# Altium PCB ToolDoorController.PcbDoc
Units mm, origin at the board's own origin, x right, y up, seen from the top; angles counter-clockwise.
Board outline 50 x 50 mm, 2 copper layers (Top Layer, Bottom Layer); 44 components, 41 nets, 165 pads, 32 vias.
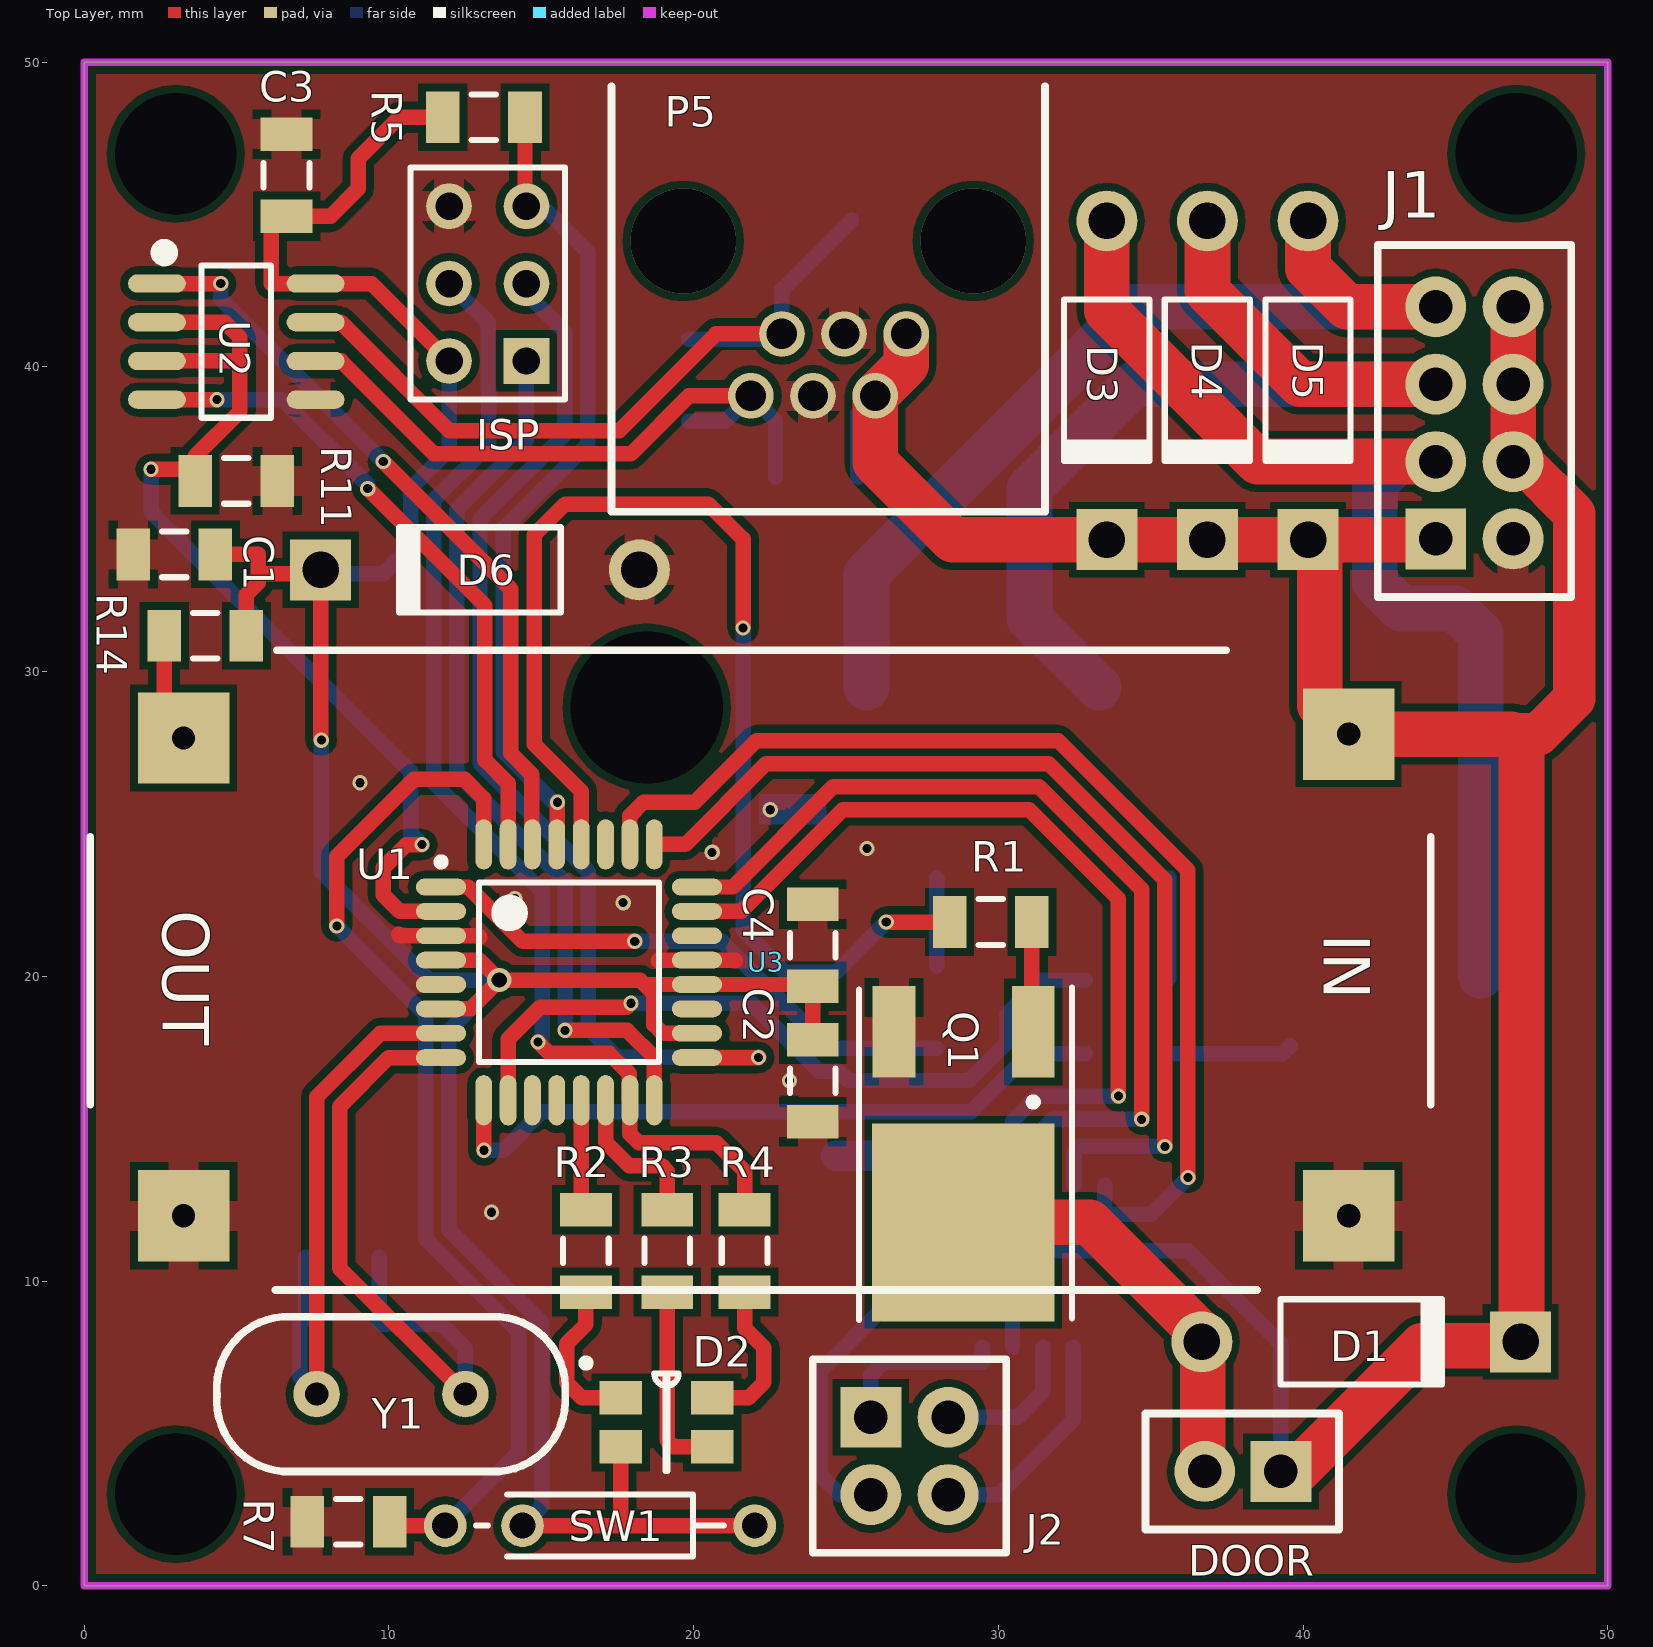
[diagram p0: Top Layer view]
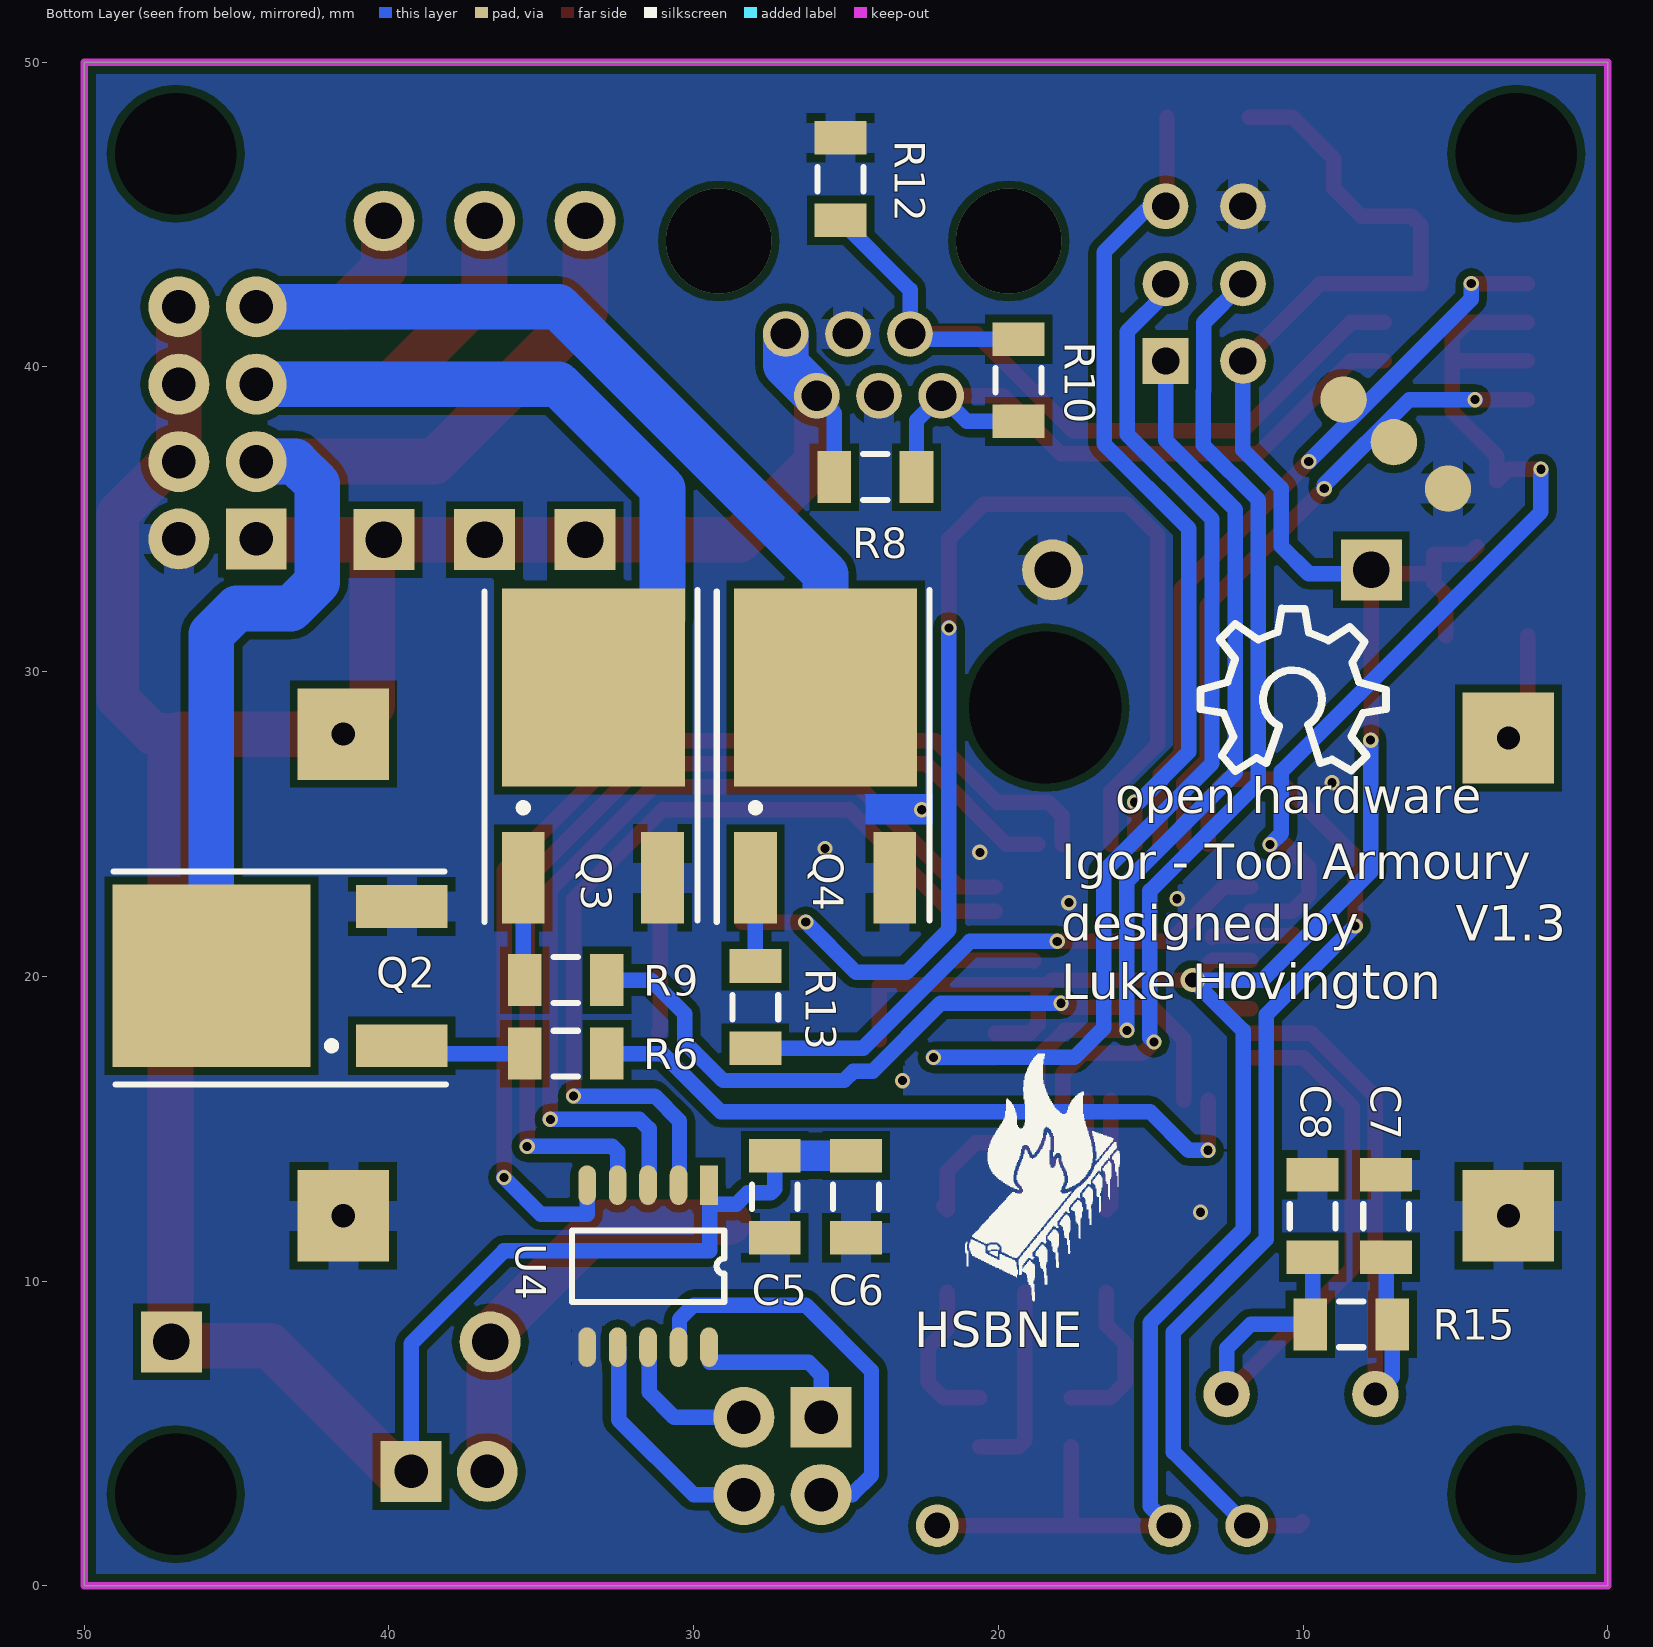
[diagram p1: Bottom Layer view, seen from below]

## Layer stack, top to bottom
Top Layer: signal copper 0.0356
Dielectric: dielectric 0.32, FR-4, Dk 4.8
Bottom Layer: signal copper 0.0356

## Board outline
0,50 50,50 50,0 0,0

## Design rules (kind name [scope] priority, off if disabled: settings)
Clearance [All] p1: gap=0.25
HoleSize [All] p1: absolutevalues=TRUE maxlimit=3.5 minlimit=0.3 maxpercent=80.000 minpercent=20.000
MinimumSolderMaskSliver [(InComponent('U1') OR InComponent('U4') OR InComponent('Y1'))] p1: minsoldermaskwidth=0.045
MinimumSolderMaskSliver MinimumSolderMaskSliver_1 [All] p2: minsoldermaskwidth=0.25
PolygonConnect [All] p1: connectstyle=Relief reliefconductorwidth=1 reliefentries=4 polygonreliefangle="90 Angle" airgapwidth=0.254
RoutingVias [All] p1: holewidth=0.3 width=0.5 viastyle="Through Hole" minholewidth=0.2 minwidth=0.5 maxholewidth=0.711 maxwidth=1.27
SilkToSolderMaskClearance [IsPad] p1 off: minsilkscreentomaskgap=0.254 clearancetoexposedcopper=TRUE
SolderMaskExpansion [All] p1: expansion=0.102
Width [All] p1: maxlimit=1.5 minlimit=0.254 preferedwidth=0.508 minimp=50.000000 maximp=50.000000 favimp=50.000000
25 further rules are at their usual default settings.

## Components (designator, comment, footprint, x,y, rotation, side; value= is the part's Value field where it differs from the comment)
C1 "100nF" C1206 2.954,33.848 r0 top
C2 "100nF" C1206 23.909,16.576 r90 top
C3 "100nF" C1206 6.637,46.294 r270 top
C4 "1uF" C1206 23.909,21.021 r270 top
C5 "1uF" C1206 27.338,12.766 r90 bottom
C6 "100nF" C1206 24.671,12.766 r90 bottom
C7 "100pF" C1206 7.272,12.131 r270 bottom
C8 "100pF" C1206 9.685,12.131 r270 bottom
D1 "Diode 1N4004" DO-41 41.91,8.001 r0 top
D2 "LED-RGB_K" RGB-CLVBAFKA 17.607,6.162 r0 top
D3 "Diode 1N4004" DO-41 33.561,39.563 r270 top
D4 "Diode 1N4004" DO-41 36.863,39.563 r270 top
D5 "Diode 1N4004" DO-41 40.165,39.563 r270 top
D6 "Zener 5v6" DO-41 12.987,33.34 r180 top
DOOR "Solenoid" JST-XH 39.276,3.749 r180 top
ISP "ISP" HDR2X3 14.511,40.198 r90 top
J1 "AuxOutput" AUX-Out 44.356,34.356 r90 top
J2 "MotorOutput" Motor_Out 25.814,5.527 r0 top
P5 "RJE01-660-01" RJ11 24.417,41.595 r180 top
Q1 "FDD7N25LZTM" DPAC-3 28.862,15.052 r180 top
Q2 "FDD7N25LZTM" DPAC-3 42.705,20.005 r90 bottom
Q3 "FDD7N25LZTM" DPAC-3 33.307,26.355 r180 bottom
Q4 "FDD7N25LZTM" DPAC-3 25.687,26.355 r180 bottom
R1 "100R" C1206 29.751,21.783 r0 top
R2 "100R" C1206 16.464,10.988 r270 top
R3 "100R" C1206 19.131,10.988 r270 top
R4 "100R" C1206 21.671,10.988 r270 top
R5 "10K" C1206 13.114,48.199 r180 top
R6 "100R" C1206 34.196,17.465 r0 bottom
R7 "10K" C1206 8.669,2.098 r0 top
R8 "390R" C1206 24.036,36.388 r0 bottom
R9 "100R" C1206 34.196,19.878 r0 bottom
R10 "220R" C1206 19.337,39.563 r270 bottom
R11 "10K" C1206 4.986,36.261 r180 top
R12 "390R" C1206 25.179,46.167 r270 bottom
R13 "100R" C1206 27.973,18.989 r90 bottom
R14 "10R" C1206 3.97,31.181 r0 top
R15 "1K" C1206 8.415,8.575 r0 bottom
SW1 "Switch" ReedSwitch 16.924,1.971 r0 top
U1 "ATmega8-16AC" 32A_N 15.908,20.132 r0 top
U2 "MAX14770EESA+" 8S1_L 4.986,40.833 r0 top
U3 "5V Buck Converter" "BUCK_MODULE - UPSIDEDOWN" 22.258,20.64 r0 top
U4 "LV8548MC Motor Driver" 10S1_M 29.497,13.147 r270 bottom
Y1 "Crystal" CRYSTAL_AXIAL 10.066,6.289 r0 top

## Footprints (in the part's own frame and the unit in brackets; to place one, negate y for a bottom-side part, rotate by r counter-clockwise, add the part's x,y. Pads: shape width x height; smd on the part's side, far side on the other; paste and mask are expansions set on the pad)
8S1_L [mm] "SOIC, 8-Leads, Body 4.9x3.9mm, Pitch 1.27mm, IPC High Density"
  oval 1.9x0.6 smd: 1(-2.604,1.905) 2(-2.604,0.635) 3(-2.604,-0.635) 4(-2.604,-1.905) 5(2.604,-1.905) 6(2.604,-0.635) 7(2.604,0.635) 8(2.604,1.905)
  silkscreen extent -2.56,-2.5 1.14,3.12, body extent -2,-2.5 2,2.5, height 1.75
10S1_M [mm]
  rect 1.3x0.58 smd: 1(0,0)
  oval 1.3x0.58 smd: 2(0,-1) 3(0,-2) 4(0,-3) 5(0,-4) 6(5.32,-4) 7(5.32,-3) 8(5.32,-2) 9(5.32,-1) 10(5.32,0)
  silkscreen extent 1.48,-4.5 3.84,0.5, body extent 0,-4.57 5.33,0.76, height 1.75
32A_N [mm] "Thin QFP, 32-Leads, Body 7x7mm, Pitch 0.8mm, IPC Medium Density"
  oval 1.65x0.55 smd: 1(-4.2,2.8) 2(-4.2,2) 3(-4.2,1.2) 4(-4.2,0.4) 5(-4.2,-0.4) 6(-4.2,-1.2) 7(-4.2,-2) 8(-4.2,-2.8) 17(4.2,-2.8) 18(4.2,-2) 19(4.2,-1.2) 20(4.2,-0.4) 21(4.2,0.4) 22(4.2,1.2) 23(4.2,2) 24(4.2,2.8)
  oval 0.55x1.65 smd: 9(-2.8,-4.2) 10(-2,-4.2) 11(-1.2,-4.2) 12(-0.4,-4.2) 13(0.4,-4.2) 14(1.2,-4.2) 15(2,-4.2) 16(2.8,-4.2) 25(2.8,4.2) 26(2,4.2) 27(1.2,4.2) 28(0.4,4.2) 29(-0.4,4.2) 30(-1.2,4.2) 31(-2,4.2) 32(-2.8,4.2)
  silkscreen extent -4.32,-2.95 2.95,3.75, body extent -3.5,-3.5 3.5,3.5, height 1.2
AUX-Out [mm] "2.54mm"
  rect 2x2 hole 1.1: 1(0,0)
  round 2 hole 1.1: 2(0,-2.54) 3(2.54,0) 4(2.54,-2.54) 5(5.08,0) 6(5.08,-2.54) 7(7.62,0) 8(7.62,-2.54)
  silkscreen extent -1.91,-4.44 9.65,1.91
"BUCK_MODULE - UPSIDEDOWN" [mm]
  round 3 hole 5 unplated: 0(-3.8,8.184)
  rect 3x3 hole 0.762: 1(19.241,7.311) 2(-19,7.184) 3(-19,-8.5) 4(19.241,-8.5)
  silkscreen extent -22.06,-10.94 21.94,10.06, body extent -21.97,-10.98 21.91,10.16, height 12
C1206 [mm] "Chip Capacitor, Body 3.2x1.6mm, IPC High Density"
  rect 1.1x1.7 smd: 1(-1.35,0) 2(1.35,0)
  silkscreen extent -0.4,-0.75 0.4,0.75, body extent -1.7,-0.9 1.7,0.9, height 1.3
CRYSTAL_AXIAL [mil] "Axial"
  round 60 hole 30: 1(-96.06,0) 2(96.06,0)
  silkscreen extent -225,-100 225,100
DO-41 [mm] "Diode, Axial; Body 5.2 x 2.7 mm (LxDia. max), Lead Dia. 0.86 mm (max)"
  round 2 hole 1.2: 1(-5.23,0)
  rect 2x2 hole 1.2: 2(5.23,0)
  silkscreen extent -2.65,-1.41 2.75,1.4
DPAC-3 [mm] "D-PAC"
  rect 6x6.5 smd: 1(0.015,3.125)
  rect 1.4x3 smd: 2(-2.285,-3.125) 3(2.285,-3.125)
  silkscreen extent -3.55,-4.58 3.43,6.33
HDR2X3 [mm] "Connector; Header; 3x2 Position"
  rect 1.5x1.5 hole 0.9: 1(0,0)
  round 1.5 hole 0.9: 2(0,2.54) 3(2.54,0) 4(2.54,2.54) 5(5.08,0) 6(5.08,2.54)
  silkscreen extent -1.27,-1.27 6.35,3.81
JST-XH [mm] "JST-XH"
  rect 2x2 hole 1.1: 1(0,0)
  round 2 hole 1.1: 2(2.5,0)
  silkscreen extent -1.91,-1.91 4.44,1.91
Motor_Out [mm] "2.54mm"
  rect 2x2 hole 1.1: 1(0,0)
  round 2 hole 1.1: 2(0,-2.54) 3(2.54,0) 4(2.54,-2.54)
  silkscreen extent -1.91,-4.44 4.44,1.91
ReedSwitch [mm] "Axial Device, Thru-Hole; 2 Leads; 0.4 in Pin Spacing"
  round 1.4 hole 0.85: 1(-5.08,0) 2(-2.54,0) 2(5.08,0)
  silkscreen extent -4.06,-1.02 4.06,1.02
RGB-CLVBAFKA [mm]
  rect 1.4x1.1 smd: 1(0,0) 2(0,-1.6) 3(3,-1.6) 4(3,0)
  silkscreen extent -1.27,-2.4 1.9,1.27
RJ11 [mm]
  round 1.5 hole 1: 1(2.54,2.54) 2(1.52,0.51) 3(0.5,2.54) 4(-0.52,0.51) 5(-1.54,2.54) 6(-2.56,0.51)
  silkscreen extent -7.11,-7.62 7.11,6.35

## Part data
C1 C2 C3 C6 C7 C8: library part "Cap 100nF", "Capacitor (Semiconductor SIM Model)"
C4 C5: library part "Cap 1uF", "Capacitor (Semiconductor SIM Model)"
D1 D3 D4 D5: "1 Amp General Purpose Rectifier"
D2: "RED, GREEN, BLUE LED"
D6: library part "Zener 1N5232BTR", "5v6 Zener"
DOOR: library part "Header 2 JST-XH", "Header, 2-Pin"
ISP: library part "Header 3X2", "Header, 3-Pin, Dual row"
J1: library part AuxOut, "AuxOut"
J2: library part MotorOut, "MotorOut"
P5: library part RJ11, "RJ11"
Q1 Q2 Q3 Q4: library part MOSFET-N, "N-Channel MOSFET"
R1 R2 R3 R4 R6 R9 R13: library part Resistor-100R, "Resistor"
R5 R7 R11 R15: library part Resistor-10K, "Resistor"
R8 R12: library part Resistor-390R, "Resistor"
R10: library part Resistor-220R, "Resistor"
R14: library part Resistor-10R, "Resistor"
SW1: "ReedSwitch"
U1: "8-Bit AVR Microcontroller with 8K Bytes of In-System Programmable Flash Memory"
U2: "TXRX PROFIBUS RS-485 8-SOIC"
U3: library part "5V Buck", "5V Buck Converter Module"
U4: library part LV8548MC, "Forward/Reverse Motor Driver"
Y1: "Surface Mount Quartz Crystal"

## Free pads (board coordinates)
  round 1.524 smd far side paste-1.524: 0(5.24,36.007) 0(7.018,37.531) 0(8.669,38.928)
  round 1.524 hole 4 unplated: ""(3,3) ""(3,47) ""(47,3) ""(47,47)

## Via types
v1: diameter 0.5, hole 0.3, Top Layer to Bottom Layer, tented both sides, 29 vias
v2: diameter 3.45, hole 3.45, Top Layer to Bottom Layer, 2 vias
v3: diameter 0.8, hole 0.5, Top Layer to Bottom Layer, tented both sides, 1 vias

## Nets (pads, with @x,y where several pads share a name; then routed paths per layer and width w, separated by ;. In a path a pad name is that pad's centre, name@x,y a point inside that pad or via, vN(x,y) a via of type N, cw(c..) or ccw(c..) an arc to the next point about the centre after c; other vN are vias at no path point)
5V: C1.2 C2.2 C3.2 C4.2 D2.2 D6.2 ISP.2 R5.2 R14.2 SW1.2 U1.4 U1.6 U1.18 U1.20 U2.8 | length 99.8
  Top Layer w0.508: C1.2@4.304,34.102 4.558,33.848 5.701,33.848 5.701,32.912 5.32,32.531 R14.2 ; 5.748,33.213 7.757,33.213 7.757,27.775 v1(7.78,27.752) ; U1.6 12.676,18.932 v3(13.622,19.878) ; U1.4 12.968,20.532 v3(13.622,19.878) ; R5.2 10.35,48.199 8.991,46.84 8.991,45.854 8.081,44.944 C3.2 6.43,44.944 6.129,44.643 6.129,42.738 7.336,42.738 9.431,42.738 ISP.2 ; SW1.2@14.384,1.971 17.686,1.971 ; D2.2 17.607,2.05 17.686,1.971 ; U1.18 18.98,18.132 18.694,18.418 18.694,19.428 18.448,19.674 ; SW1.2@22.004,1.971 17.686,1.971 ; C2.2 C4.2 23.848,19.732 U1.20 18.506,19.732 18.448,19.674 ; v3(13.622,19.878) 13.63,19.87 18.252,19.87 18.448,19.674
  Bottom Layer w0.508: D6.2@7.757,33.213 9.812,33.213 10.709,34.11 10.709,36.015 11.971,37.277 ISP.2 ; v1(7.78,27.752) 7.78,23.434 11.336,19.878 v3(13.622,19.878) 11.967,18.223 11.967,11.683 15.019,8.631 15.019,2.606 SW1.2@14.384,1.971
12V: C5.2 C6.2 D1.2 D3.2 D4.2 D5.2 DOOR.1 J1.1 J1.4 J1.6 J1.8 P5.5 P5.6 R8.2 U3.1 U4.1 | length 111.6
  Top Layer w1.4: 46.824,27.951 47.73,27.951 48.9,29.121 48.9,35.186 J1.4@47.19,36.896
  Top Layer w1.5: P5.6 26.977,40.075 P5.5 25.957,36.88 28.504,34.333 D3.2 D4.2 D5.2 D5.2@40.546,34.333 ; DOOR.1@39.53,3.495 43.909,7.874 47.013,7.874 47.173,8.034 47.173,27.602 46.824,27.951 U3.1 40.546,28.903 D5.2@40.546,34.333 ; J1.1@44.333,34.333 D5.2@40.546,34.333 ; J1.8 J1.6 J1.4 J1.4@47.19,36.896
  Bottom Layer w0.508: R8.2 25.386,38.484 P5.5 ; C5.2 27.338,13.02 27.465,12.893 28.227,12.893 28.608,12.512 U4.1@29.465,12.512 ; U4.1@29.465,13.147 U4.1@29.465,12.512 ; DOOR.1@39.276,3.241 39.276,7.94 36.228,10.988 29.465,10.988 U4.1@29.465,12.512
  Bottom Layer w1: C6.2 C5.2
  Bottom Layer w1.5: P5.5 26.977,40.075 P5.6
AUX1: R6.1 U1.9 | length 22.7
  Top Layer w0.508: v1@13.108,14.296 U1.9
  Bottom Layer w0.508: v1(13.114,14.29) 13.749,14.29 15.019,15.56 29.116,15.56 31.021,17.465 R6.1
AUX2: R9.1 U1.10 | length 24.4
  Top Layer w0.508: U1.10 13.908,17.934 14.959,18.985 17.803,18.985 v1@17.93,19.112
  Bottom Layer w0.508: v1(17.94,19.116) 21.892,19.116 24.127,16.881 24.761,16.881 25.061,16.581 29.033,16.581 30.298,17.846 30.298,18.774 31.402,19.878 R9.1
AUX3: R13.1 U1.1 | length 18.5
  Top Layer w0.508: U1.1 12.6,22.932 14.384,21.148 v1(18.067,21.148)
  Bottom Layer w0.508: v1(18.067,21.148) 20.932,21.148 24.441,17.639 R13.1
AUX_OUT1: D3.1 J1.3 Q2.1 | length 36.7
  Top Layer w1.5: D3.1 33.561,41.849 38.514,36.896 J1.3
  Bottom Layer w1.5: J1.3 43.086,36.896 42.352,36.162 42.352,32.94 43.222,32.07 44.991,32.07 45.83,31.231 Q2.1
AUX_OUT2: D4.1 J1.5 Q3.1 | length 33.3
  Top Layer w1.5: D4.1 36.863,42.484 39.911,39.436 J1.5
  Bottom Layer w1.5: Q3.1 31.021,31.751 31.021,36.007 34.45,39.436 J1.5
AUX_OUT3: D5.1 J1.7 Q4.1 | length 32.3
  Top Layer w1.5: D5.1 40.165,43.246 41.435,41.976 J1.7
  Bottom Layer w1.5: Q4.1 25.672,33.198 34.45,41.976 J1.7
COM_TR: R11.2 U1.2 U2.2 U2.3 | length 32.5
  Top Layer w0.508: v1(2.192,36.642) 3.255,36.642 R11.2 3.636,37.07 5.109,38.543 5.109,40.964 4.605,41.468 U2.2@2.636,41.468 ; U2.3@2.636,40.198 4.986,40.198 ; v1(11.082,24.323) 10.572,24.323 9.812,23.563 9.812,22.672 10.352,22.132 U1.2
  Bottom Layer w0.508: v1(2.192,36.642) 2.192,35.245 10.709,26.728 10.709,24.696 v1(11.082,24.323)
DOOR: R1.1 U1.28 | length 39.4
  Top Layer w0.508: U1.28 16.308,26.082 14.765,27.625 14.765,34.483 15.781,35.499 20.48,35.499 21.623,34.356 v1(21.623,31.435) ; v1(26.322,21.783) R1.1
  Bottom Layer w0.508: v1(21.623,31.435) 21.623,21.529 23.02,20.132 24.671,20.132 v1(26.322,21.783)
GND: C1.1 C2.1 C3.1 C4.1 C5.1 C6.1 C7.1 C8.1 D6.1 ISP.6 J1.2 P5.3 P5.4 pad.0@5.24,36.007 Q1.3 Q2.3 Q3.3 Q4.3 R7.1 R11.1 R12.1 U1.3 U1.5 U1.21 U2.5 U3.3 U3.4 U4.6 | length 5.3
  Top Layer w0.508: 10.32,21.374 10.362,21.332 U1.3 12.945,21.332 12.987,21.29 ; 18.829,20.513 18.848,20.532 U1.21 21.35,20.532 21.369,20.513
  other v1: 13.368,12.258 23.145,16.576 17.686,22.418 14.13,22.545 20.607,24.069 25.687,24.196 22.512,25.466 9.05,26.355
LED_B: R3.1 U1.14 | length 5.1
  Top Layer w0.508: U1.14 17.108,14.558 17.88,13.786 18.952,13.786 19.131,13.607 R3.1
LED_R: R2.1 U1.13 | length 3.7
  Top Layer w0.508: U1.13 16.308,12.494 R2.1
M1_1: U1.23 U4.2 | length 28.8
  Top Layer w0.508: U1.23 21.557,22.132 24.891,25.466 31.021,25.466 33.942,22.545 v1(33.942,16.068)
  Bottom Layer w0.508: U4.2@30.465,13.147 30.465,15.258 31.275,16.068 v1(33.942,16.068)
M1_2: U1.24 U4.3 | length 30.1
  Top Layer w0.508: U1.24 21.285,22.932 24.577,26.224 31.335,26.224 34.7,22.859 34.7,15.31 v1(34.704,15.306)
  Bottom Layer w0.508: U4.3@31.465,13.147 31.465,14.992 31.779,15.306 v1(34.704,15.306)
M2_1: U1.25 U4.4 | length 32.3
  Top Layer w0.508: U1.25 19.727,24.332 22.377,26.982 31.649,26.982 35.458,23.173 35.458,15.624 35.462,15.62 35.462,14.421 v1(35.466,14.417)
  Bottom Layer w0.508: U4.4 32.497,14.242 32.672,14.417 v1(35.466,14.417)
M2_2: U1.26 U4.5 | length 36.3
  Top Layer w0.508: U1.26 17.908,25.27 18.358,25.72 20.043,25.72 22.063,27.74 31.963,27.74 36.216,23.487 36.216,17.465 36.224,17.457 36.224,13.405 v1(36.228,13.401)
  Bottom Layer w0.508: U4.5 33.497,12.195 35.022,12.195 v1(36.228,13.401)
MICRO_SWITCH: R7.2 SW1.1 U1.32 | length 35.2
  Top Layer w0.508: v1(8.288,21.656) 8.288,23.942 10.816,26.47 12.479,26.47 13.108,25.841 U1.32 ; R7.2 10.146,1.971 SW1.1 SW1.1@11.67,2.145
  Bottom Layer w0.508: v1(8.288,21.656) 11.209,18.735 11.209,11.369 14.257,8.321 14.257,4.384 SW1.1
MISO: ISP.1 U1.16 | length 29.1
  Top Layer w0.508: v1(15.781,18.227) 17.813,18.227 18.708,17.332 U1.16
  Bottom Layer w0.508: ISP.1 14.511,37.602 12.225,35.316 12.225,26.674 15.781,23.118 v1(15.781,18.227)
MOSI: ISP.4 R4.1 U1.15 | length 38.8
  Top Layer w0.508: v1(14.892,17.846) 15.269,17.469 17.223,17.469 17.887,16.805 17.887,15.953 U1.15 17.908,14.83 18.194,14.544 20.734,14.544 21.671,13.607 R4.1 R4.1@21.798,12.465
  Bottom Layer w0.508: ISP.4 13.257,41.452 13.257,39.22 13.277,39.2 13.277,37.44 11.467,35.63 11.467,26.36 15.023,22.804 15.023,17.977 v1(14.892,17.846)
NetC7_2: C7.2 R15.1 U1.7 Y1.1 | length 19.5
  Top Layer w0.508: Y1.1 7.626,16.041 9.717,18.132 U1.7
  Bottom Layer w0.508: C7.2 7.272,8.782 R15.1 7.065,6.85 Y1.1
NetC8_2: C8.2 R15.2 U1.8 Y1.2 | length 21.9
  Top Layer w0.508: U1.8 9.989,17.332 8.384,15.727 8.384,10.411 Y1.2
  Bottom Layer w0.508: C8.2 9.685,8.655 R15.2 11.717,8.575 12.506,7.786 Y1.2
NetD1_1: D1.1 DOOR.2 Q1.1 | length 13.9
  Top Layer w1.5: Q1.1 33.003,11.927 36.713,8.217 36.713,3.812 DOOR.2
NetD2_1: D2.1 R2.2 | length 5.2
  Top Layer w0.508: R2.2 16.464,8.575 15.829,7.94 15.829,6.67 16.337,6.162 D2.1
NetD2_3: D2.3 R3.2 | length 6.4
  Top Layer w0.508: R3.2 19.131,4.765 19.334,4.562 D2.3
NetD2_4: D2.4 R4.2 | length 5.1
  Top Layer w0.508: D2.4 21.798,6.162 22.306,6.67 22.306,7.813 21.671,8.448 R4.2
NetJ2_1: J2.1 U4.10 | length 5.7
  Bottom Layer w0.508: J2.1 25.814,6.924 26.227,7.337 29.465,7.337 U4.10@29.465,7.827
NetJ2_2: J2.2 U4.9 | length 13.7
  Bottom Layer w0.508: J2.2 24.798,2.987 24.163,3.622 24.163,7.051 26.322,9.21 30.005,9.21 30.465,8.75 U4.9@30.465,7.827
NetJ2_3: J2.3 U4.8 | length 4.9
  Bottom Layer w0.508: J2.3 30.64,5.527 31.465,6.352 U4.8@31.465,7.827
NetJ2_4: J2.4 U4.7 | length 7.5
  Bottom Layer w0.508: J2.4 30.005,2.987 32.465,5.447 U4.7@32.465,7.827
NetQ1_2: Q1.2 R1.2 | length 3.6
  Top Layer w0.508: R1.2 31.101,18.223 Q1.2
NetQ2_2: Q2.2 R6.2 | length 4.1
  Bottom Layer w0.508: R6.2 39.325,17.465 Q2.2
NetQ3_2: Q3.2 R9.2 | length 3.4
  Bottom Layer w0.508: R9.2 35.592,19.924 Q3.2
NetQ4_2: Q4.2 R13.2 | length 2.9
  Bottom Layer w0.508: Q4.2 27.972,20.34 R13.2
NetR14_1: R14.1 U3.2 | length 3.5
  Top Layer w0.508: R14.1 2.62,28.221 U3.2@3.017,27.824
RS485_A: P5.1 R8.1 R10.2 U2.6 | length 22
  Top Layer w0.508: U2.6@7.336,40.198 8.427,40.198 11.475,37.15 17.94,37.15 19.845,39.055 P5.1
  Bottom Layer w0.508: R10.2@19.845,38.213 21.035,38.213 P5.1 22.686,38.246 R8.1
RS485_B: P5.2 R10.1 R12.2 U2.7 | length 26.1
  Top Layer w0.508: U2.7@7.336,41.468 8.415,41.468 11.971,37.912 17.559,37.912 20.732,41.085 P5.2
  Bottom Layer w0.508: R10.1@19.845,40.913 P5.2@22.897,40.913 ; P5.2 22.893,41.089 22.893,42.531 R12.2
RST: ISP.5 R5.1 U1.29 | length 26.7
  Top Layer w0.508: R5.1 14.464,45.325 ISP.5 ; U1.29 U1.29@15.527,24.351 ; U1.29@15.527,24.605 v1(15.527,25.714)
  Bottom Layer w0.508: ISP.5 15.019,45.278 16.527,43.77 16.527,37.474 13.745,34.692 13.745,27.375 15.406,25.714 v1(15.527,25.714)
RXD: pad.0@8.669,38.928 U1.30 U2.1 | length 24.5
  Top Layer w0.508: U2.1@2.636,42.738 v1(4.478,42.738) ; v1(9.812,36.896) 14.003,32.705 14.003,27.315 14.687,26.631 14.687,24.353 U1.30
  Bottom Layer w0.508: v1(4.478,42.738) 4.478,42.23 v1(9.812,36.896)
SCK: ISP.3 U1.17 | length 35.6
  Top Layer w0.508: U1.17 22.125,17.332 v1(22.131,17.338)
  Bottom Layer w0.508: ISP.3 14.511,42.416 15.769,41.158 15.769,37.788 12.987,35.006 12.987,26.99 16.539,23.438 16.539,18.302 17.503,17.338 v1(22.131,17.338)
TXD: pad.0@7.018,37.531 U1.31 U2.4 | length 21.5
  Top Layer w0.508: U2.4@2.636,38.928 v1(4.351,38.928) ; v1(9.304,36.007) 13.146,32.165 13.146,27.1 13.908,26.338 U1.31
  Bottom Layer w0.508: v1(4.351,38.928) 6.51,38.928 9.304,36.134 v1(9.304,36.007)
pads on no net: U1.11 U1.12 U1.19 U1.22 U1.27 U3.0
copper on no net:
  other v2: 19.657,44.135 29.177,44.135

## Polygon pours and split planes (outlines as drawn)
GND on Top Layer "Top Layer-No Net" (solid, remove dead copper, pour order 2): 0,0 50,0 50,50 0,50
GND on Bottom Layer "Top Layer-No Net" (solid, remove dead copper, pour order 3): 0,0 50,0 50,50 0,50

## Keep-outs
Keep-Out Layer:
  the board outline again, w0.254

## Other copper
Bottom Layer:
  rectangle net GND: 22.137,24.984 24.356,25.98

## Silkscreen, mask and mechanical layers (free items; w line width, h text height)
Bottom Overlay:
  drawing of 1356 lines, arcs and shapes, not listed
  text "open hardware" at 16.162,24.958 h2
  text "Igor - Tool Armoury" at 17.94,22.799 h2
  text "V1.3" at 4.986,20.767 h2
  text "designed by" at 17.94,20.767 h2
  text "Luke Hovington" at 17.94,18.862 h2
  text "HSBNE" at 22.766,7.432 h2

## Text inside footprints (layer, text, board x,y; h text height)
U3: Top Overlay "IN" at 40.673,21.402 h1.52 r270; Top Overlay "OUT" at 2.573,22.164 h1.52 r270